# EAGLE board pcb1f (EAGLE 9.6.2)
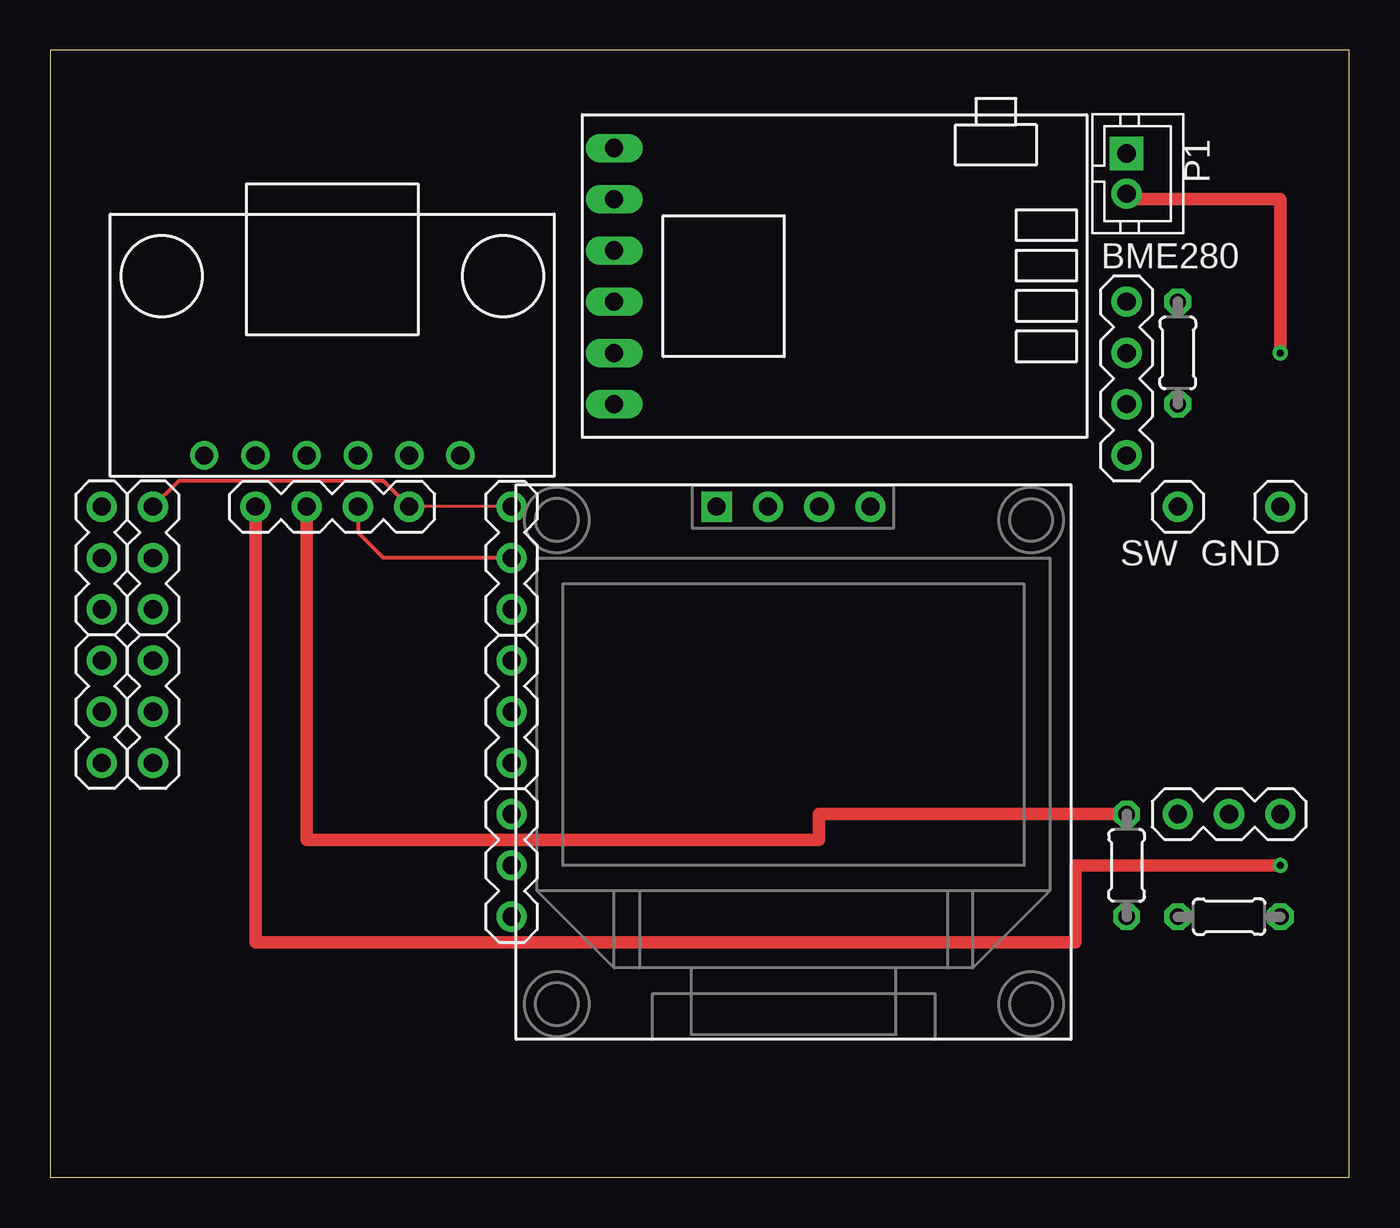
[diagram p0: board, top side]
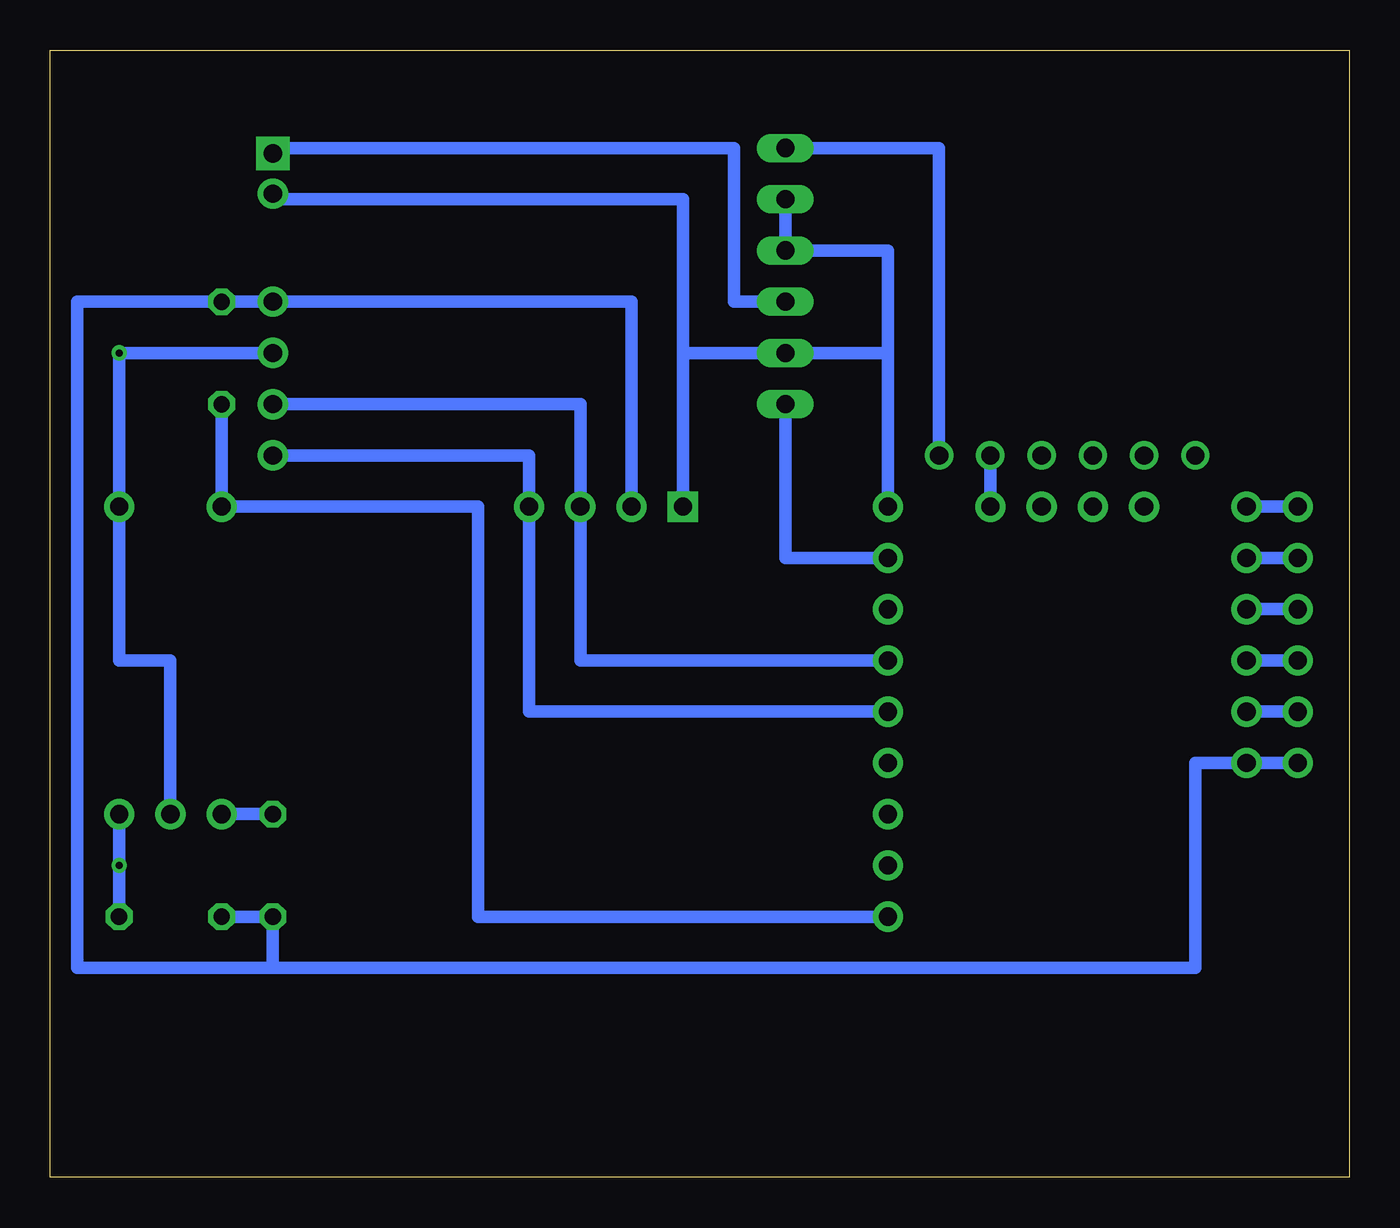
[diagram p1: board, bottom side, seen from below]

Size 64.36 x 55.86 mm. Coordinates in mm from the lower left corner, seen from the top.
Outline: 0,0 64.36,0 64.36,55.86 0,55.86 0,0
Copper layers (1*16): Top 0.035mm / dielectric 1.5mm / Bottom 0.035mm
Design rules "default": minimum track width 6mil, minimum drill 0.35mm, track to track 6mil, track to pad 6mil, pad to pad 6mil, via to via 6mil, smd to smd 6mil, copper to edge 40mil, drill to drill 6mil, minimum pad ring 10mil, minimum via ring 8mil, stop-mask expansion 4mil, vias tented up to drill 0mil, thermal gap 10mil

## Footprints (pad centres in the part's own frame; a part is rotated, then mirrored left to right if it is on the bottom)
PINHEAD-MA04-1 = drill 0.9 pad 1.5: 1 -3.81,0; 2 -1.27,0; 3 1.27,0; 4 3.81,0
MH-CD42 = drill 0.9 long: 5V 10.16,6.35; BAT 10.16,1.27; GND5V 10.16,3.81; GNDBAT 10.16,-1.27; GNDVIN 10.16,-3.81; VIN 10.16,-6.35
PINHEAD-MA01-1 = drill 0.9 pad 1.5: 1 1.27,0
OLED-I2C-0.96 = drill 0.9 pad 1.5 square: GND -5.08,10.16 | drill 0.9 pad 1.5: SCL 0,10.16; SDA 2.54,10.16; VCC -2.54,10.16
JST-PH2 = drill 0.9 pad 1.676 square: 1 -1,0 | drill 0.9 pad 1.5: 2 1,0
0204/5 = drill 0.813 octagon: 1 -2.54,0; 2 2.54,0
PINHEAD-MA03-1 = drill 0.9 pad 1.5: 1 -1.27,0; 2 1.27,0; 3 3.81,0
USB-C-DIRECT = drill 0.9: CC1 1.27,-13.97; CC2 -6.35,-13.97; D+ -3.81,-13.97; D- -1.27,-13.97; GND 3.81,-13.97; VBUS 6.35,-13.97

## Placement (x,y rotation side)
BME280  [PINHEAD-MA04-1]  53.34,39.6 270 top
CD1  MH-CD42  [MH-CD42]  38.1,44.68 180 top
GND  [PINHEAD-MA01-1]  59.69,33.25 0 top
OLED1  OLED-SSD1306-0.96  [OLED-I2C-0.96]  38.1,23.09 0 top
P1  [JST-PH2]  53.34,49.76 270 top
R1  10K  [0204/5]  55.88,40.87 90 top
R2  10K  [0204/5]  58.42,12.93 0 top
R3  10K  [0204/5]  53.34,15.47 90 top
SV3  [PINHEAD-MA04-1]  13.97,33.25 180 top
SV4  [PINHEAD-MA03-1]  22.86,29.44 90 top
SV5  [PINHEAD-MA03-1]  22.86,21.82 90 top
SV6  [PINHEAD-MA03-1]  22.86,14.2 90 top
SV7  [PINHEAD-MA03-1]  5.08,31.98 270 top
SV8  [PINHEAD-MA03-1]  5.08,24.36 270 top
SV9  [PINHEAD-MA03-1]  57.15,18.01 0 top
SV10  [PINHEAD-MA03-1]  2.54,31.98 270 top
SV11  [PINHEAD-MA03-1]  2.54,24.36 270 top
SW  [PINHEAD-MA01-1]  54.61,33.25 0 top
USB1  [USB-C-DIRECT]  13.97,49.76 0 top

## Library data of the parts
BME280 SV3-SV11 = ytani1; OC_FARNELL: unknown; OC_NEWARK: unknown
CD1 GND P1 SW USB1 = ytani1
OLED1 = ytani1; OC_AKIZUKI: P-12031; URL_AKIZUKI: https://akizukidenshi.com/catalog/g/gP-12031/
R1-R3 = rcl; SPICEPREFIX: R

## Nets
+3V3: BME280.1 OLED1.VCC R1.2 R2.1 R3.1 SV8.3 SV11.3
+5V: CD1.5V SV3.2 SV4.2
BAT+: CD1.BAT P1.1
GND: BME280.2 CD1.GND5V CD1.GNDBAT CD1.GNDVIN GND.1 OLED1.GND P1.2 SV3.1 SV4.3 SV7.1 SV9.2 SV10.1 USB1.GND
N$2: BME280.3 OLED1.SCL SV5.3
N$3: BME280.4 OLED1.SDA SV5.2
N$4: SV7.2 SV10.2
N$5: R1.1 SV6.1 SW.1
N$6: R3.2 SV3.3 SV9.1
N$7: SV7.3 SV10.3
N$8: SV8.1 SV11.1
N$9: SV8.2 SV11.2
N$11: R2.2 SV3.4 SV9.3
VBUS: CD1.VIN USB1.VBUS

## Tracks (layer width: path | path; a pad name or v marks a point on that pad's centre or on a via)
+3V3
  Bottom 0.61: OLED1.VCC 35.56,43.41 BME280.1 R1.2 63.04,43.41 63.04,10.39 53.34,10.39 | R2.1 R3.1 53.34,10.39 | 53.34,10.39 7.62,10.39 7.62,20.55 SV8.3 SV11.3
+5V
  Top 0.2: SV3.2 15.24,31.98 16.51,30.71 SV4.2
  Bottom 0.61: CD1.5V 27.94,30.71 SV4.2
BAT+
  Bottom 0.61: CD1.BAT 30.48,43.41 30.48,51.03 53.07,51.03 P1.1
GND  (via drill 0.35)
  Top 0.152: SV4.3 SV3.1
  Top 0.2: SV7.1 6.35,34.52 16.51,34.52 SV3.1
  Top 0.61: P1.2 53.61,48.49 60.96,48.49 v60.96,40.87
  Bottom 0.61: SV7.1 SV10.1 | 33.02,35.79 OLED1.GND 33.02,40.87 | SV9.2 58.42,25.63 60.96,25.63 GND.1 v60.96,40.87 BME280.2 | CD1.GNDVIN CD1.GNDBAT 22.86,45.95 22.86,40.87 | 33.02,40.87 33.02,48.49 53.07,48.49 P1.2 | 33.02,40.87 CD1.GND5V 22.86,40.87 | SV3.1 USB1.GND | SV4.3 22.86,40.87
N$2
  Bottom 0.61: SV5.3 38.1,25.63 OLED1.SCL 38.1,38.33 BME280.3
N$3
  Bottom 0.61: SV5.2 40.64,23.09 OLED1.SDA 40.64,35.79 BME280.4
N$4
  Bottom 0.61: SV7.2 SV10.2
N$5
  Bottom 0.61: R1.1 SW.1 43.18,33.25 43.18,12.93 SV6.1
N$6
  Top 0.61: SV3.3 12.7,16.74 38.1,16.74 38.1,18.01 R3.2
  Bottom 0.61: R3.2 SV9.1
N$7
  Bottom 0.61: SV7.3 SV10.3
N$8
  Bottom 0.61: SV8.1 SV11.1
N$9
  Bottom 0.61: SV8.2 SV11.2
N$11  (via drill 0.35)
  Top 0.61: SV3.4 10.16,11.66 50.8,11.66 50.8,15.47 v60.96,15.47
  Bottom 0.61: SV9.3 v60.96,15.47 R2.2
VBUS
  Bottom 0.61: CD1.VIN 20.32,51.03 USB1.VBUS